# Altium PCB 飞控底板兼容版.PcbDoc
Units mil, origin at the board's own origin, x right, y up, seen from the top; angles counter-clockwise.
Board outline 1946.25 x 1781.68 mil, 4 copper layers (Top Layer, GND, VCC, Bottom Layer), stack 30.634 mil thick; 58 components, 74 nets, 313 pads, 169 vias.
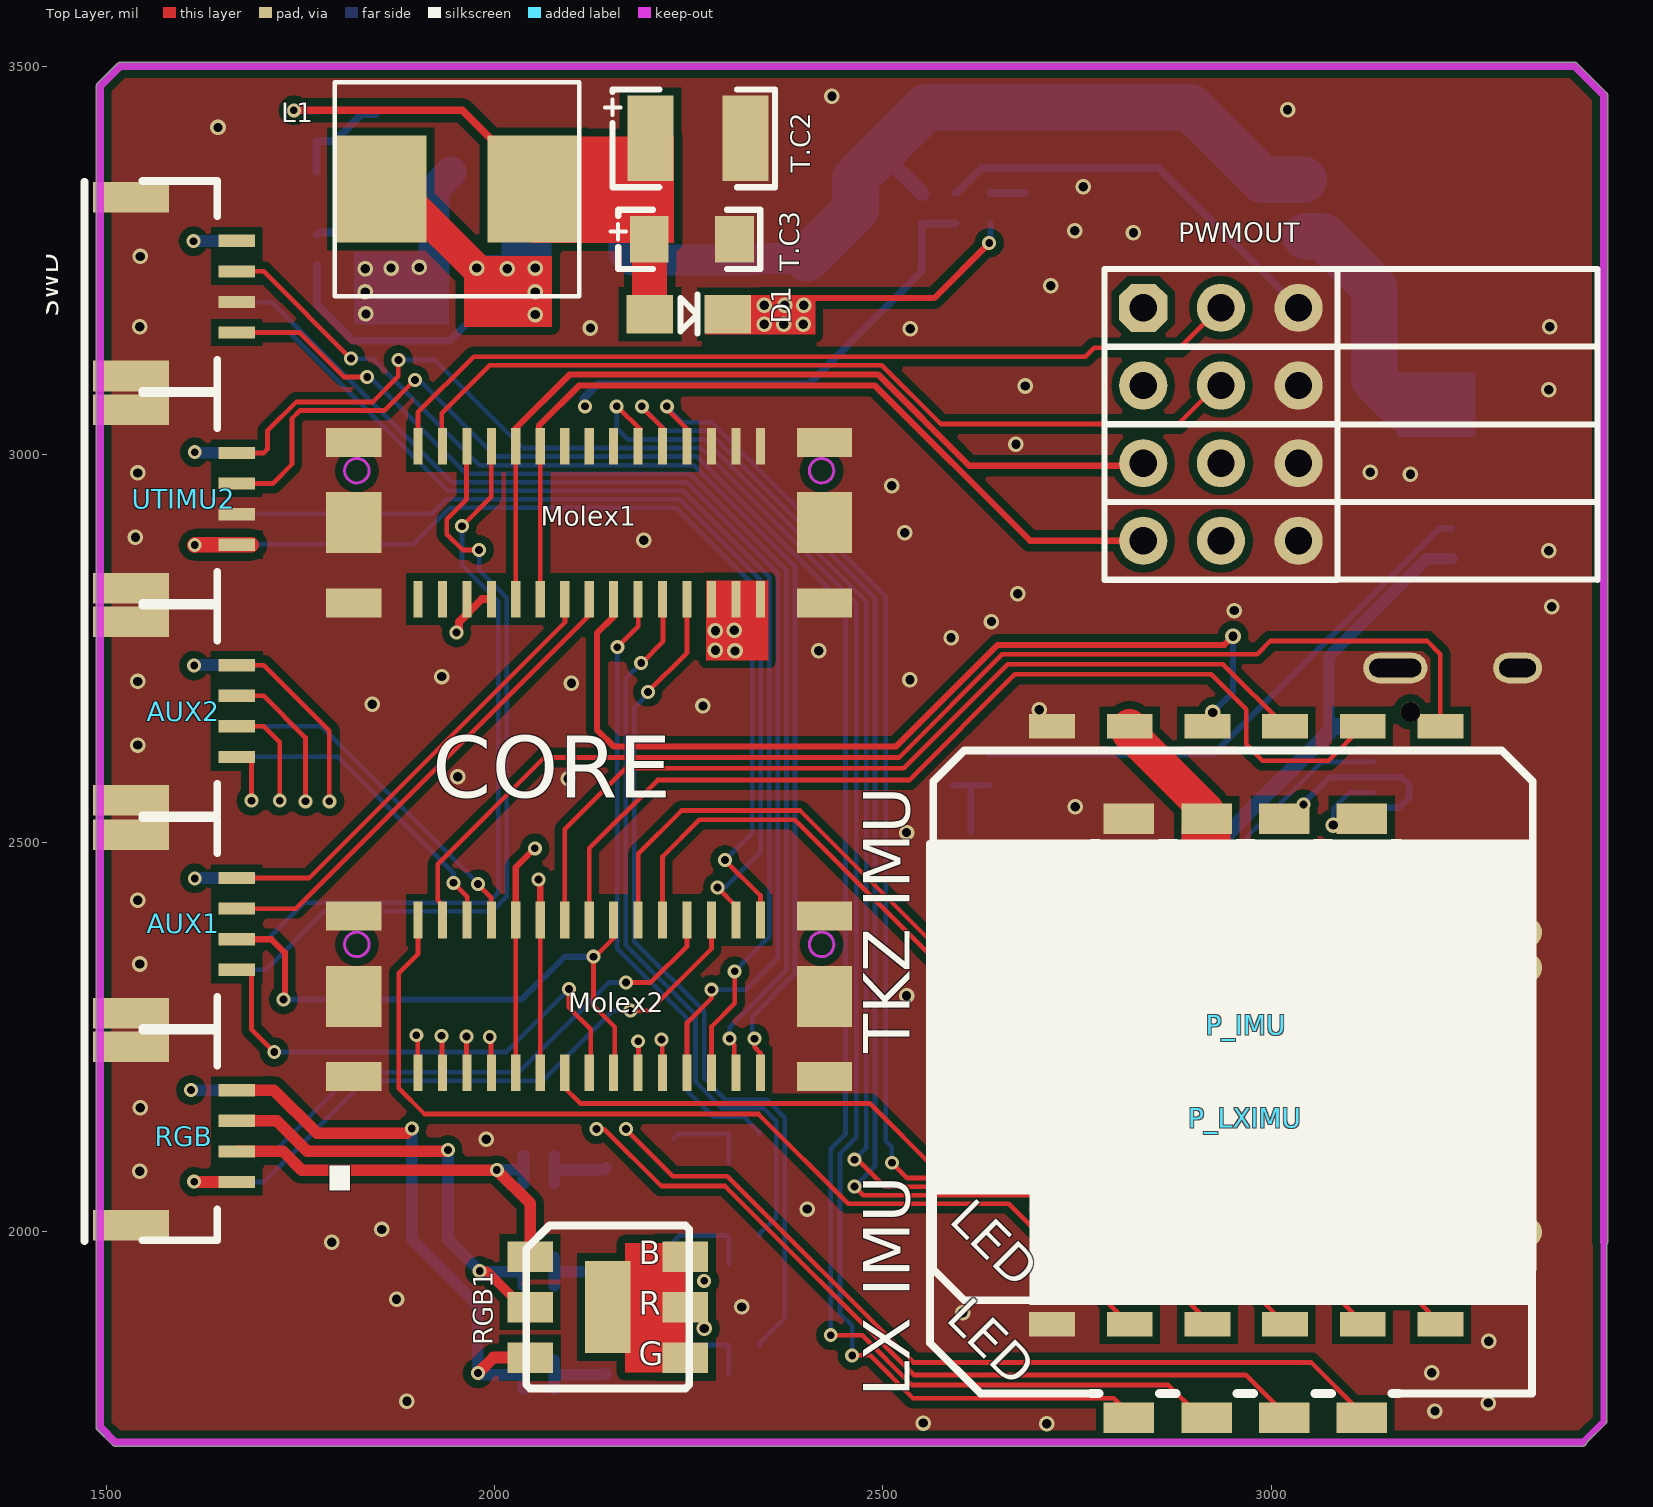
[diagram p0: Top Layer view]
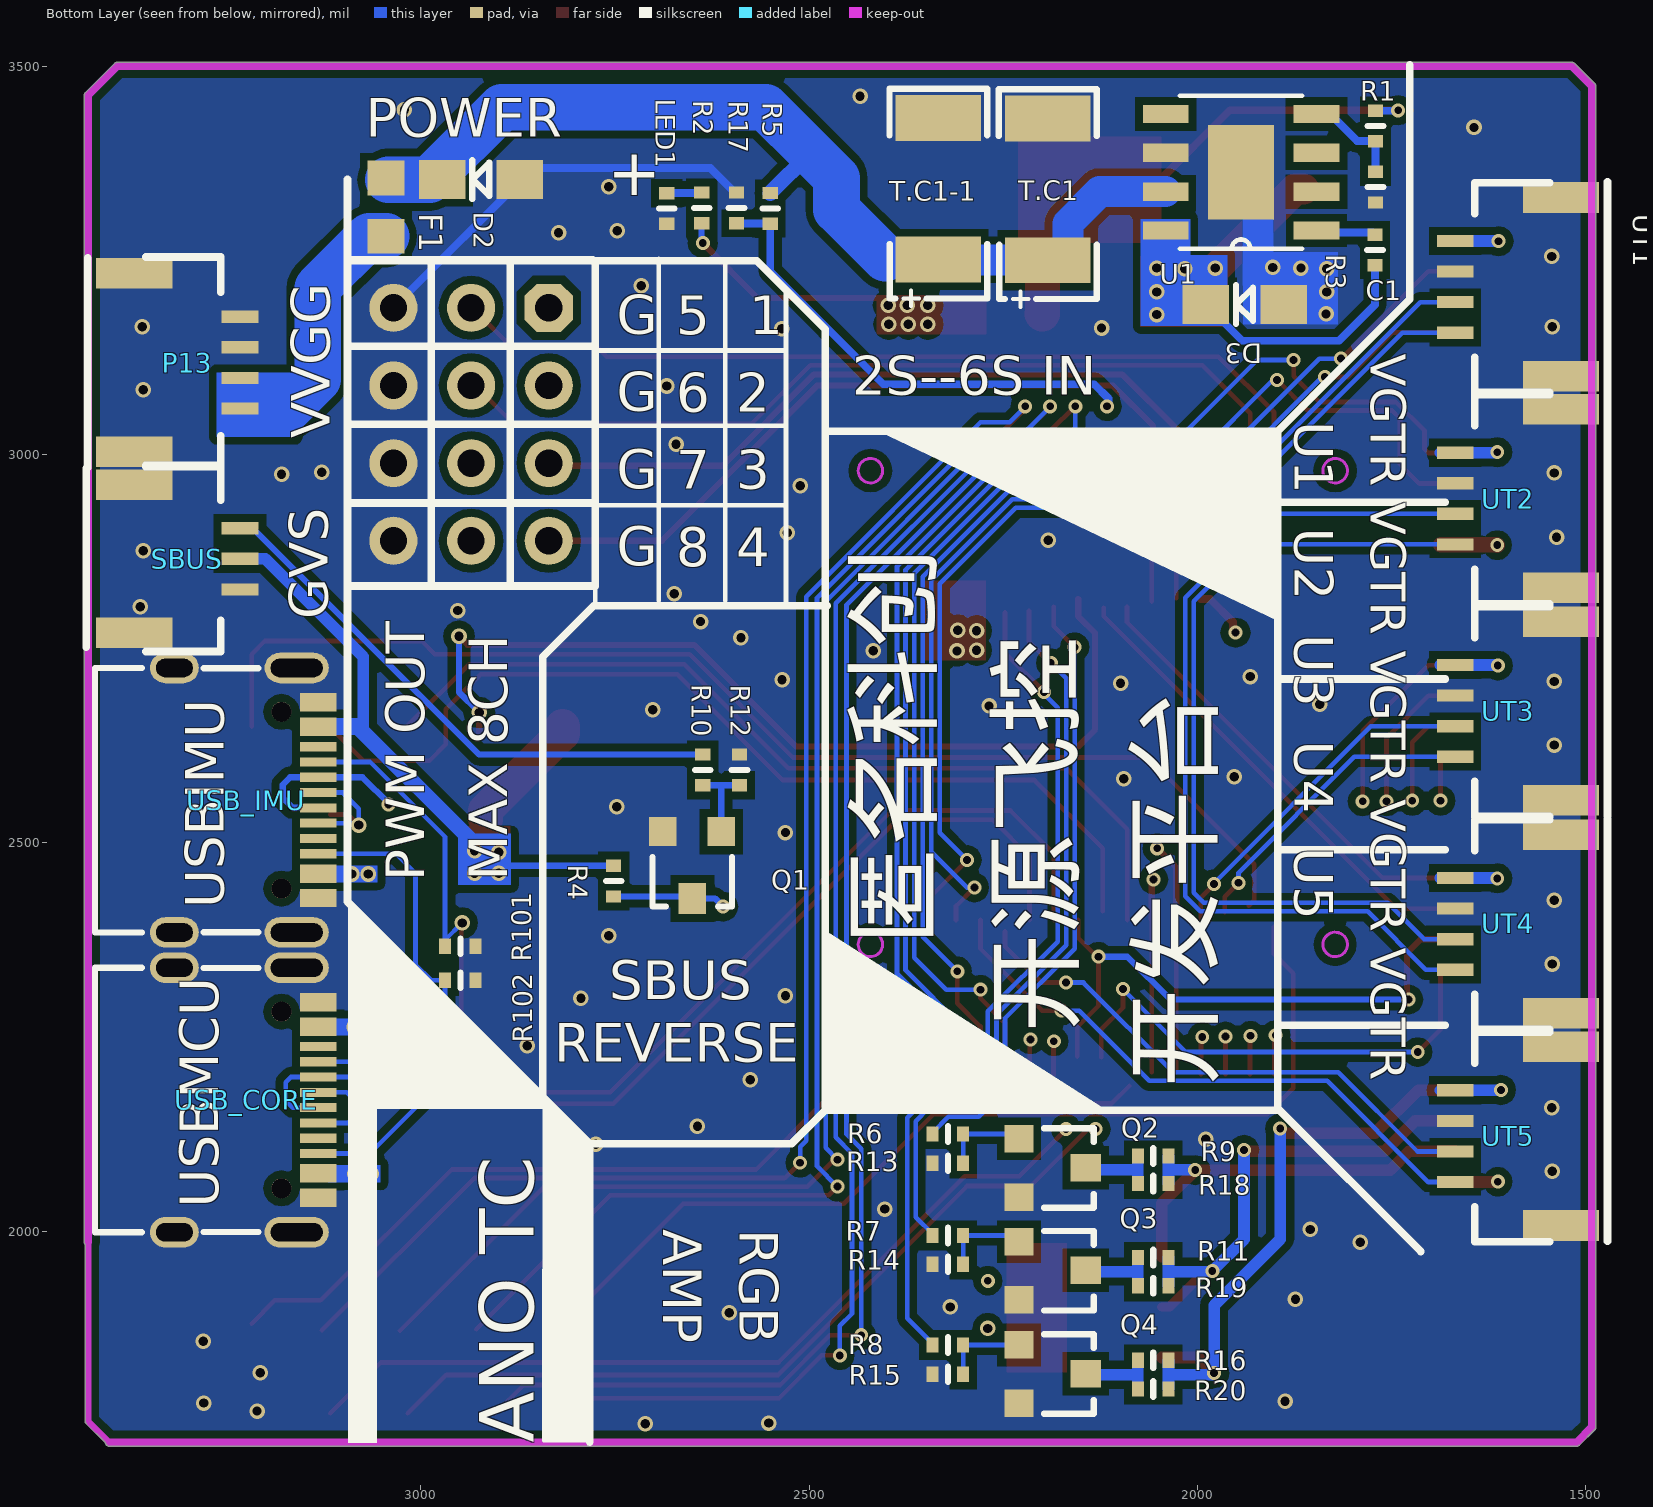
[diagram p1: Bottom Layer view, seen from below]
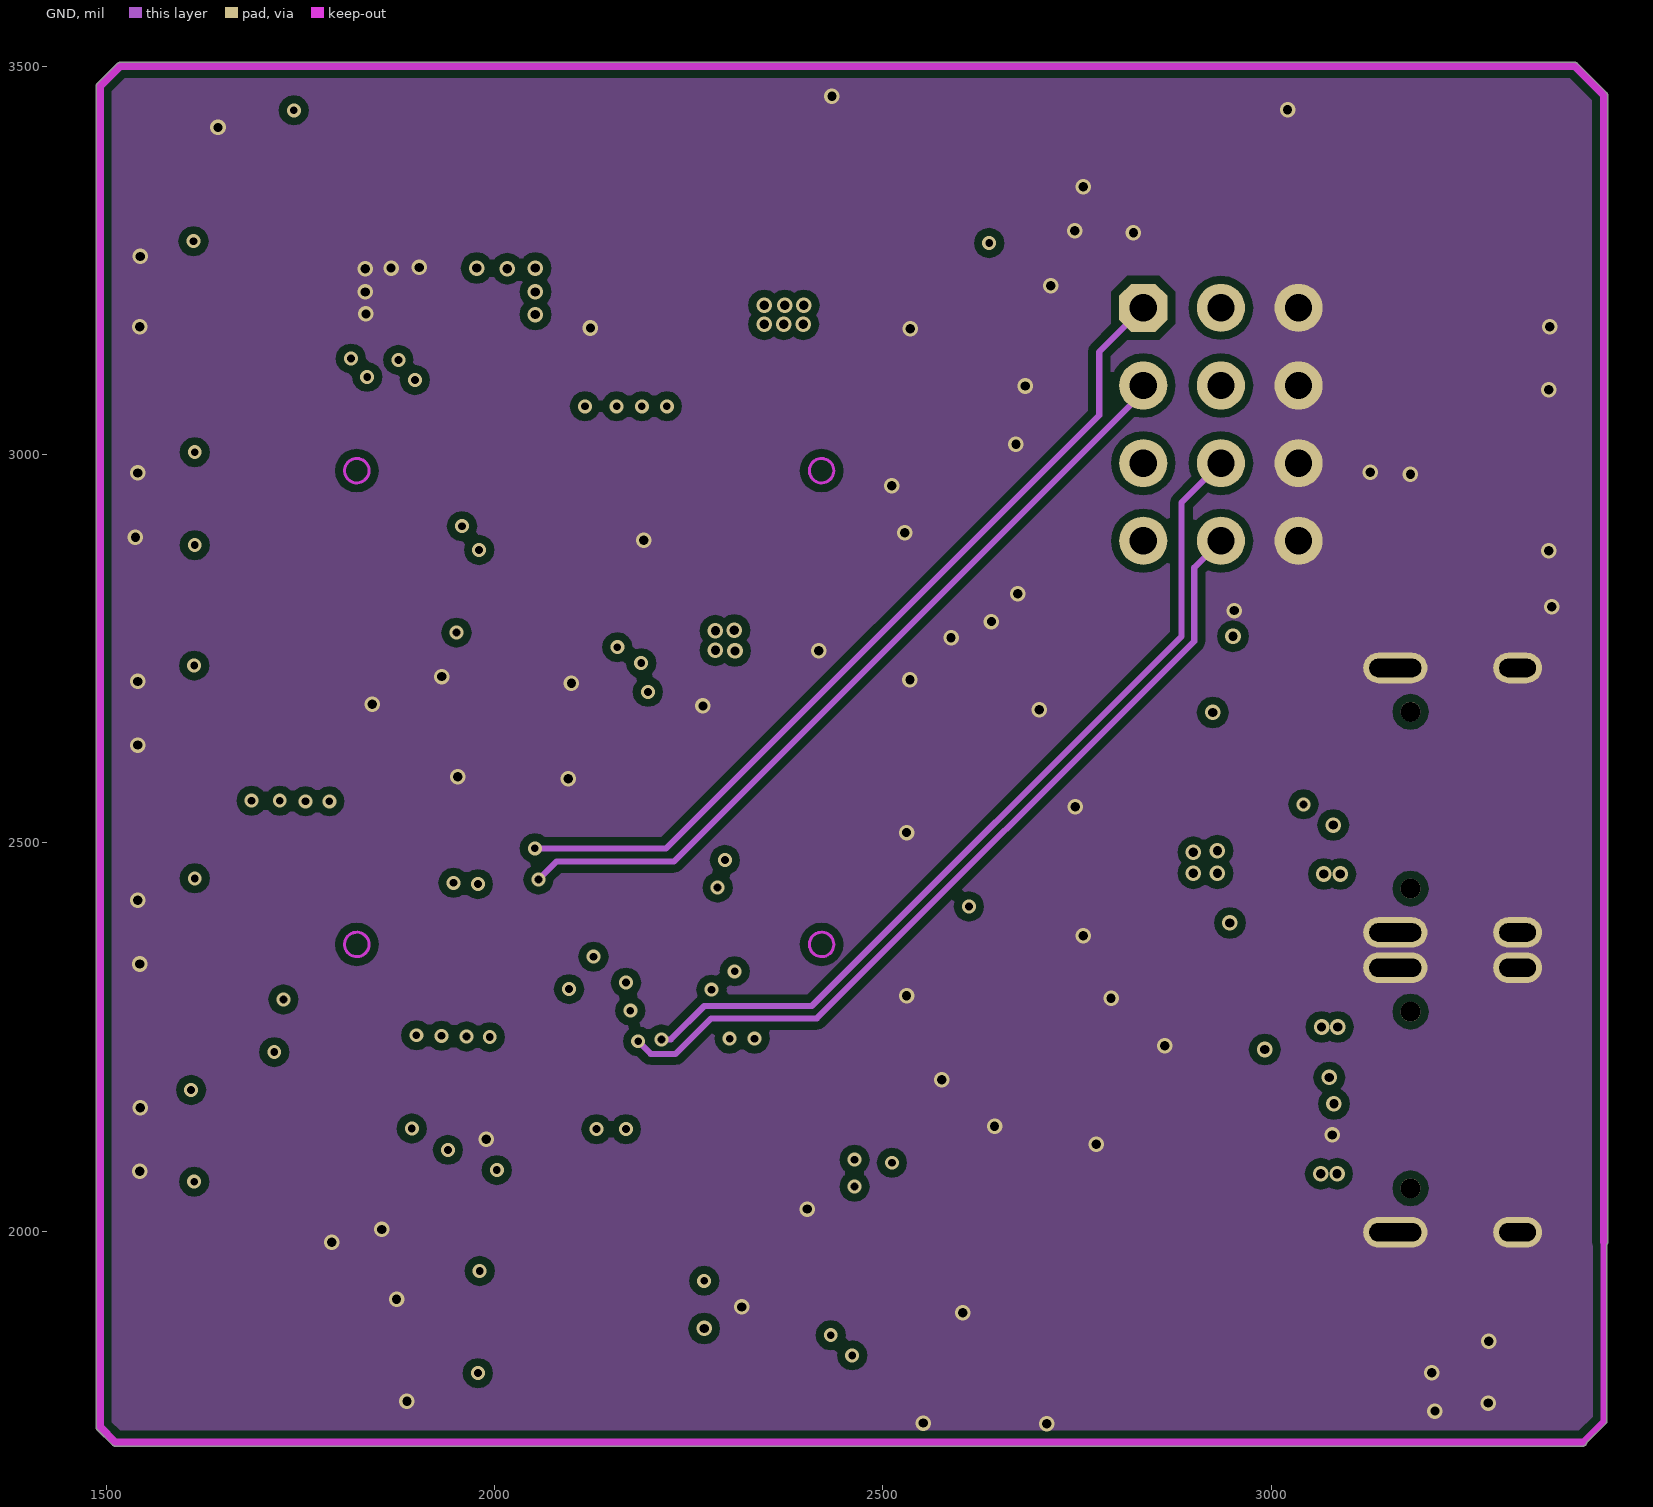
[diagram p2: GND]
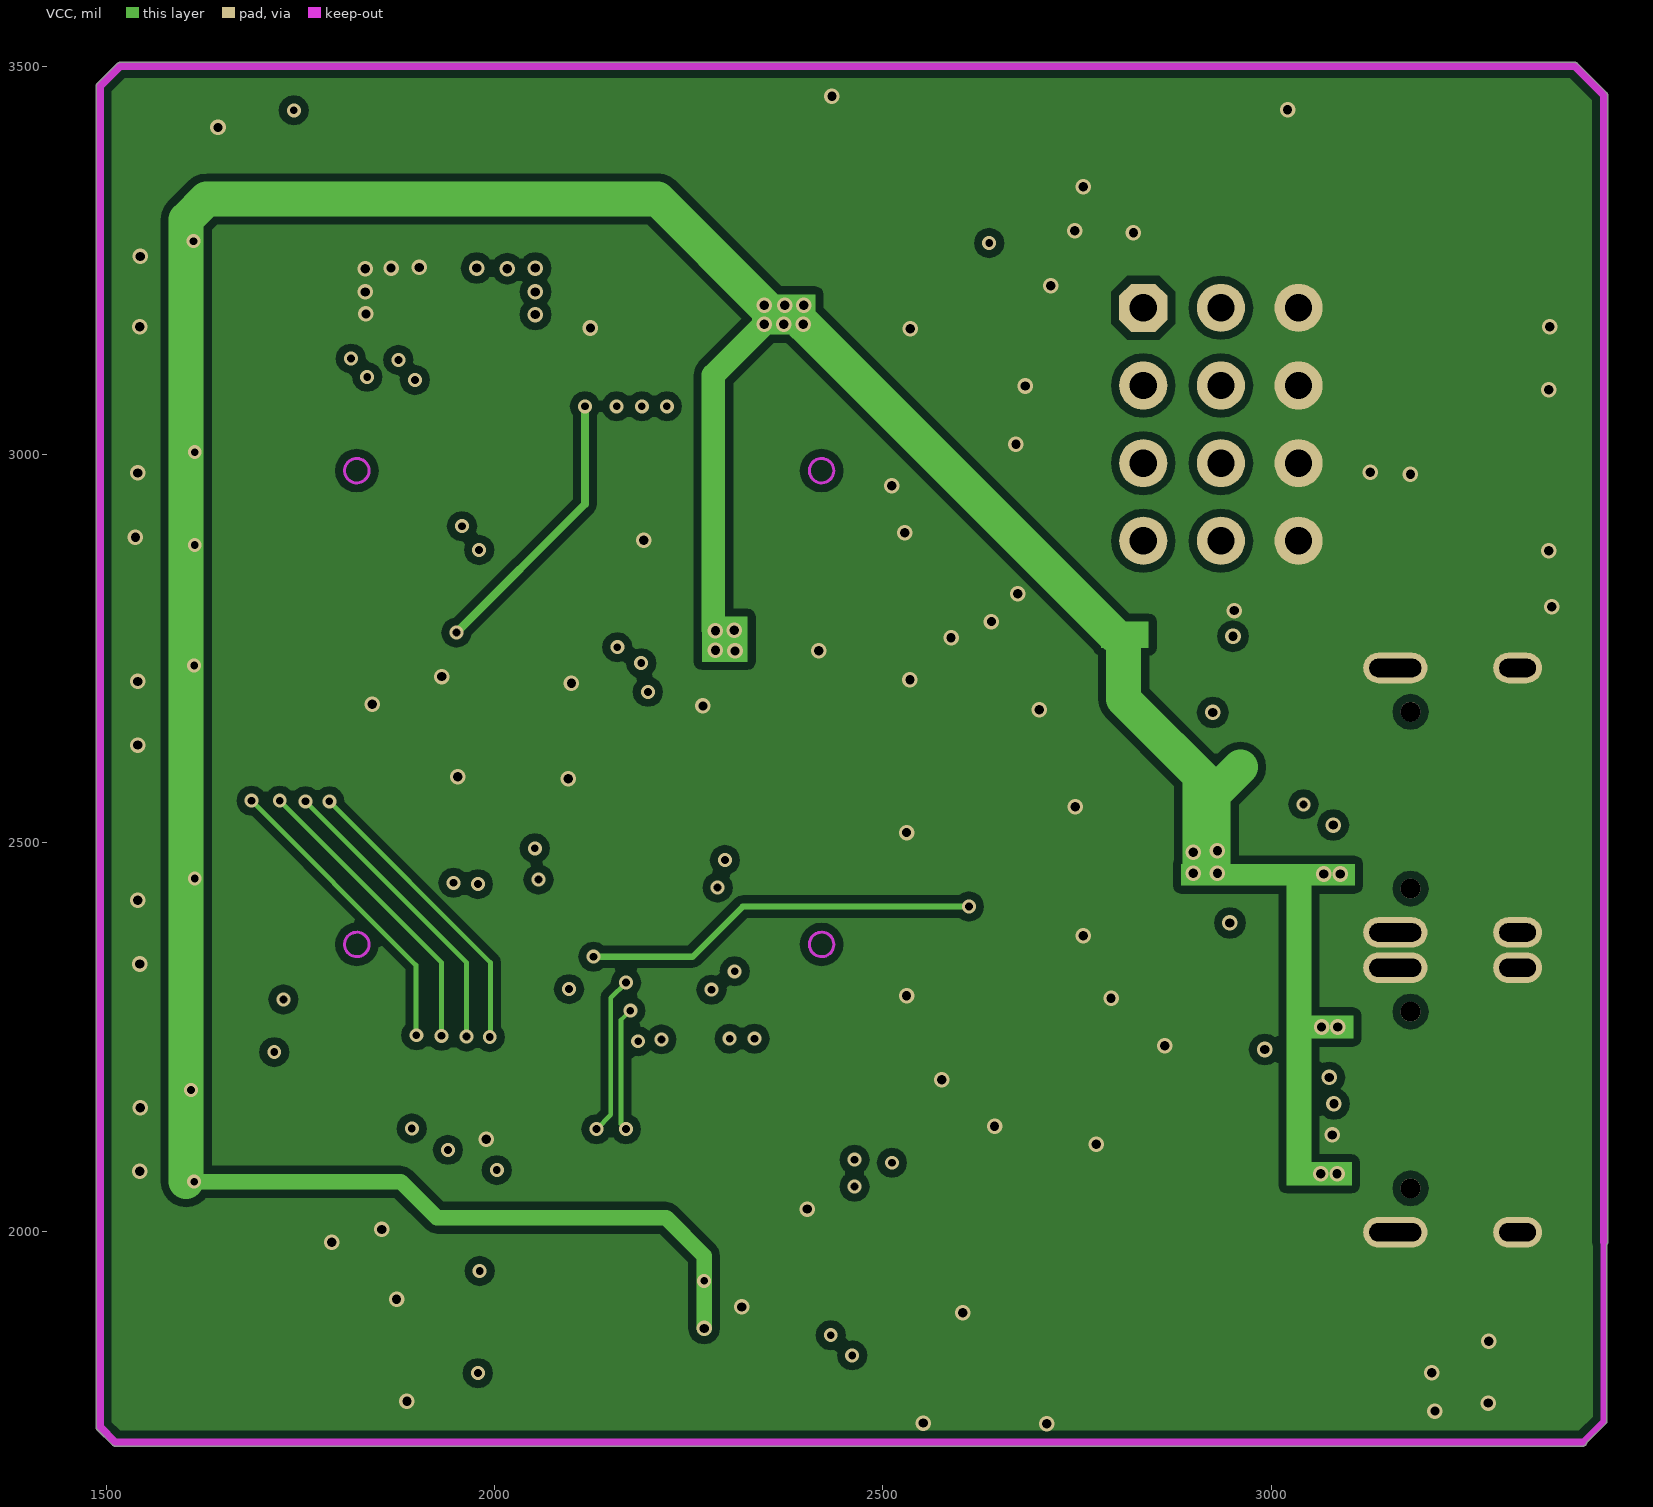
[diagram p3: VCC]

## Layer stack, top to bottom
Top Solder: solder mask 0.4, Solder Resist, Dk 3.5
Top Layer: signal copper 1.4
Dielectric1: core 10, FR-4, Dk 4.2
GND: signal copper 1.417
Dielectric2: prepreg 5, Dk 4.2
VCC: signal copper 1.417
Dielectric3: core 10, Dk 4.2
Bottom Layer: signal copper 1.4
Bottom Solder: solder mask 0.4, Solder Resist, Dk 3.5

## Board outline
1508.11,1724.8 1488.58,1744.33 1488.6,1744.31 cw(c1492.13,1747.87) 1487.11,1747.87 1487.11,3474.13 cw(c1492.13,3474.13) 1488.6,3477.69 1488.58,3477.67 1514.45,3503.55 1514.44,3503.53 cw(c1518,3500) 1518,3505.01 3391,3505.01 cw(c3391,3500) 3394.56,3503.53 3394.55,3503.55 3431.89,3466.2 3431.88,3466.22 cw(c3428.35,3462.65) 3433.36,3462.65 3433.36,1986 cw(c3428.35,1986) 3432.36,1982.99 3432.36,1755.35 cw(c3428.35,1755.35) 3431.17,1752.49 3431.19,1752.51 3406.31,1727.63 cw(c3401.35,1728.35) 3401.35,1723.33 1511.65,1723.33 cw(c1511.65,1728.35)

## Design rules (kind name [scope] priority, off if disabled: settings)
Clearance Clearance_1 [InPolygon] p1: gap=10
Clearance [All] p2: gap=5
ComponentClearance [All] p1: gap=0 collisioncheckmode=3 verticalgap=0 showdistances=FALSE
FabricationTestpoint [(IsPad And (OnTopLayer Or OnBottomLayer))] p1: side=3 testpointundercomponent=TRUE minsize=40 maxsize=100 preferedsize=60 minholesize=0 maxholesize=40 preferedholesize=32 testpointgrid=1 allowsidetop=TRUE allowsidebottom=TRUE usegrid=TRUE gridtolerance=0.01
HoleSize [All] p1: absolutevalues=TRUE maxlimit=196.85 minlimit=1 maxpercent=80.000 minpercent=20.000
HoleToHoleClearance [All] p1: gap=5 allowstackedmicrovias=TRUE
MinimumSolderMaskSliver [All] p1: minsoldermaskwidth=1
PlaneClearance [All] p1: clearance=10
PlaneConnect [All] p1: planeconnectstyle=Direct reliefexpansion=20 reliefentries=4 reliefconductorwidth=10 reliefairgap=10
PolygonConnect [All] p1: connectstyle=Direct reliefconductorwidth=10 reliefentries=4 polygonreliefangle="90 Angle" airgapwidth=10
RoutingVias [All] p1: holewidth=10 width=18 viastyle="Through Hole" minholewidth=10 minwidth=18 maxholewidth=28 maxwidth=50
SilkToSilkClearance [All] p1: silktosilkclearance=0
SilkToSolderMaskClearance [IsPad] p1: minsilkscreentomaskgap=0 clearancetoexposedcopper=TRUE
SolderMaskExpansion [All] p1: expansion=4
Width [All] p1: maxlimit=100 minlimit=4 preferedwidth=5
21 further rules are at their usual default settings.

## Components (designator, comment, footprint, x,y, rotation, side; value= is the part's Value field where it differs from the comment)
AUX1 "AUX_IO" SH_1.0_卧 1540.06,2280.31 r90 top
AUX2 "AUX_IO" SH_1.0_卧 1540.06,2554.32 r90 top
C1 "10nf50v" 0402_small 1771.65,3263.75 r90 bottom
D1 "IN5822" SOD123 2249.61,3181.86 r90 top
D2 "IN5822" SOD123 2922,3353 r270 bottom
D3 "IN5822" SOD123 1938.59,3192.15 r270 bottom
F1 "Comment" 0805_small 3045,3356 r270 bottom
L1 "CD54‐22uH  2A" L-8X7mm-S 1951.97,3341.73 r180 top
LED1 "red" 0402_small 2683.44,3316.54 r270 bottom
Molex1 "MOLEX_30p_母" MOLEX_30p_ĸ 1901.57,3010.79 r0 top
Molex2 "MOLEX_30p_母" MOLEX_30p_ĸ 1901.57,2400.79 r0 top
P13 "power" SH_1.0_卧 3361,3003 r90 bottom
P_IMU "IMU_TKZ" IMU_TKZ_SM2 2603,1911 r0 top
P_LXIMU "IMU_LX" IMU-LX-SM2 2963,2144 r0 top
PWMOUT "HEAD2.54" HEAD1*3*4W 2835.43,3188.98 r270 top
Q1 "si2310" SOT-23 2650.38,2461.42 r0 bottom
Q2 "si2310" SOT-23 2177.17,2081.9 r270 bottom
Q3 "si2310" SOT-23 2177.17,1949.62 r270 bottom
Q4 "si2310" SOT-23 2177.17,1816.55 r270 bottom
R1 "50k" 0402_small 1770.87,3422.86 r270 bottom
R2 "1k" 0402_small 2638.59,3317.35 r270 bottom
R3 "15k" 0402_small 1770.87,3344.12 r270 bottom
R4 "10K" 0402_small 2751.96,2451.17 r90 bottom
R5 "10k 1%" 0402_small 2550.39,3317.31 r90 bottom
R6 "1k" 0402_small 2321.9,2125.2 r0 bottom
R7 "1k" 0402_small 2321.26,1994.48 r180 bottom
R8 "1k" 0402_small 2321.26,1853.54 r180 bottom
R9 "50" 0402_small 2057.47,2096.86 r0 bottom
R10 "1K" 0402_small 2637,2593.71 r270 bottom
R11 "50" 0402_small 2057.47,1966.13 r0 bottom
R12 "10K" 0402_small 2589.75,2593.71 r270 bottom
R13 "10K" 0402_small 2321.26,2087.41 r180 bottom
R14 "10K" 0402_small 2321.26,1957.49 r180 bottom
R15 "10K" 0402_small 2321.26,1815.76 r180 bottom
R16 "50" 0402_small 2057.47,1833.85 r0 bottom
R17 "1k 1%" 0402_small 2593.69,3317.33 r270 bottom
R18 "50" 0402_small 2057.47,2061.41 r0 bottom
R19 "50" 0402_small 2057.47,1929.91 r0 bottom
R20 "50" 0402_small 2057.47,1796.84 r0 bottom
R101 "5.1K" 0402_small 2949,2367 r180 bottom
R102 "5.1K" 0402_small 2949,2323 r180 bottom
RGB "RGB-VBRG" SH_1.0_卧 1540.06,2007.08 r90 top
RGB1 "RGB-LED" zhuixin_5050RGB 2040.93,2002.36 r0 top
SBUS "SBUS" SH_1.0_3P卧 3362,2772 r90 bottom
SWD "swd" SH_1.0_卧 1540.06,3100.78 r90 top
T.C1 "100uf35V" TAN-C(6032-28) 2192.94,3337.79 r180 bottom
T.C1-1 "100uf35V" TAN-C(6032-28) 2333.87,3338.58 r180 bottom
T.C2 "47uf16V" TAN-B(3528-21) 2262.2,3407.11 r270 top
T.C3 "10uf16V" TAN-A(3216-18) 2254.34,3277.14 r180 top
U1 "TPS5430" R-PDSO-G8 1944.06,3268.51 r0 bottom
USB_CORE "Type-C" Type-C 3282,2169 r270 bottom
USB_IMU "Type-C" Type-C 3282,2555 r270 bottom
UT1 "usart1" SH_1.0_卧 1540.06,3331.5 r270 bottom
UT2 "usart2" SH_1.0_卧 1540.06,3058.87 r270 bottom
UT3 "usart3" SH_1.0_卧 1540.06,2785.44 r270 bottom
UT4 "usart4" SH_1.0_卧 1540.06,2511.23 r270 bottom
UT5 "usart5" SH_1.0_卧 1540.06,2237.81 r270 bottom
UTIMU2 "usart_imu" SH_1.0_卧 1540.06,2827.56 r90 top

## Footprints (in the part's own frame and the unit in brackets; to place one, negate y for a bottom-side part, rotate by r counter-clockwise, add the part's x,y. Pads: shape width x height; smd on the part's side, far side on the other; paste and mask are expansions set on the pad)
0402_small [mm]
  rect 0.4x0.5 smd: 1(-0.508,0) 2(0.492,0)
  silkscreen extent -0.01,-0.25 -0.01,0.25, body extent -0.51,-0.25 0.51,0.25, height 0.51
0805_small [mm]
  rect 1.14x1.2 smd: 1(0,0) 2(1.9,0)
HEAD1*3*4W [mil]
  oct 62x62 hole 35: 1(0,0)
  round 62 hole 35: 2(0,100) 3(0,200) 4(100,0) 5(100,100) 6(100,200) 7(200,0) 8(200,100) 9(200,200) 10(300,0) 11(300,100) 12(300,200)
  silkscreen extent -50,-50 350,585, body extent -43,-51 351,249, height 336
IMU-LX-SM2 [mil]
  rect 65x39.37 smd: 1(-146,387) 2(-46,387) 3(54,387) 4(154,387) 5(154,-384) 6(54,-384) 7(-46,-384) 8(-146,-384)
  silkscreen extent -402,-353 373,355
IMU_TKZ_SM2 [mil]
  rect 59.06x31.5 smd: 1(115,739) 2(215,739) 3(315,739) 4(415,739) 5(515,739) 6(615,739) 7(615,-31) 8(515,-31) 9(415,-31) 10(315,-31) 11(215,-31) 12(115,-31)
  silkscreen extent -38,0 734,708
L-8X7mm-S [mm]
  rect 3x3.5 smd: 1(-2.5,0) 2(2.5,0)
  silkscreen extent -4,-3.5 4,3.5, body extent -2.79,-2.67 2.92,2.53, height 4.5
MOLEX_30p_ĸ [mm]
  rect 1.8x0.95 smd: 0(-2.1,-5.125) 0(-2.1,0.125) 0(13.3,-5.125) 0(13.3,0.125)
  rect 1.8x2 smd: 0(-2.1,-2.5) 0(13.3,-2.5)
  rect 0.3x1.2 smd: 1(11.2,0) 2(10.4,0) 3(9.6,0) 4(8.8,0) 5(8,0) 6(7.2,0) 7(6.4,0) 8(5.6,0) 9(4.8,0) 10(4,0) 11(3.2,0) 12(2.4,0) 13(1.6,0) 14(0.8,0) 15(0,0) 16(0,-5) 17(0.8,-5) 18(1.6,-5) 19(2.4,-5) 20(3.2,-5) 21(4,-5) 22(4.8,-5) 23(5.6,-5) 24(6.4,-5) 25(7.2,-5) 26(8,-5) 27(8.8,-5) 28(9.6,-5) 29(10.4,-5) 30(11.2,-5)
  Keep-Out Layer circle w0.1: c-2,-0.8 r0.4
  Keep-Out Layer circle w0.1: c13.2,-0.8 r0.4
R-PDSO-G8 [mil]
  rect 59.06x23.62 smd: 1(-97,-20) 2(-97,-70) 3(-97,-120) 4(-97,-170) 5(97,-170) 6(97,-120) 7(97,-70) 8(97,-20)
  rect 85x122 smd paste-60.5: 9(0,-95)
  silkscreen extent -78,-194 78,4, body extent -122,-194 122,4, height 67
SH_1.0_3P卧 [mm]
  rect 1x2.5 smd: 0(-0.039,0.178) 0(4.803,0.178)
  rect 0.4x1.2 smd: 1(1.381,-3.279) 2(2.381,-3.279) 3(3.381,-3.279)
  silkscreen extent -0.65,-2.64 5.45,1.75
SH_1.0_卧 [mm]
  rect 0.4x1.2 smd: 1(1.432,-3.254) 2(2.432,-3.254) 3(3.432,-3.254) 4(4.432,-3.254)
  rect 1x2.5 smd: 5(0.011,0.203) 5(5.853,0.203)
  silkscreen extent -0.5,-2.62 6.39,1.73, body extent -0.05,-3.43 5.95,1.53, height 3.14
SOD123 [mil]
  rect 50x60 smd: 1(-1.06,49.34) 2(-1.06,-50.66)
  silkscreen extent -26,-12 24,10
SOT-23 [mm]
  rect 0.9x0.95 smd: 1(-0.94,-1.346) 2(0.965,-1.346)
  rect 0.9x1 smd: 3(0,0.838)
  silkscreen extent -1.29,-0.52 1.31,1.1, body extent -1.42,-1.63 1.48,1.17, height 1.3
TAN-A(3216-18) [mil]
  rect 50x60 smd: 1(55,0) 2(-55,0)
  silkscreen extent -88,-38 105,38, body extent -75,-30 75,30, height 39
TAN-B(3528-21) [mm]
  rect 2.8x1.5 smd: 1(0,-1.55) 2(0,1.55)
  silkscreen extent -1.6,-3.05 1.6,2.51
TAN-C(6032-28) [mm]
  rect 2.8x1.5 smd: 1(0,-2.222) 2(0,2.413)
  silkscreen extent -1.6,-3.75 1.6,3.37
Type-C [mm]
  round 0.65 hole 0.65: 0(-2.89,2.6) 0(2.89,2.6)
  oval 1x1.6 hole 0.6 slot 1.2 at 90 deg: 1(4.325,-0.9) 2(-4.325,-0.9)
  oval 1x2.1 hole 0.6 slot 1.7 at 90 deg: 3(-4.325,3.1) 4(4.325,3.1)
  rect 0.3x1.2 smd: A1(-3.35,3.8) A4(-2.55,3.8) A5(-1.25,3.8) A6(-0.25,3.8) A7(0.25,3.8) A8(1.25,3.8) A9(2.55,3.8) A12(3.35,3.8) B1(3.05,3.8) B4(2.25,3.8) B5(1.75,3.8) B6(0.75,3.8) B7(-0.75,3.8) B8(-1.75,3.8) B9(-2.25,3.8) B12(-3.05,3.8)
  silkscreen extent -4.33,-3.5 4.32,1.84, body extent -4.48,-3.5 4.47,4.25, height 3.26
zhuixin_5050RGB [mm]
  rect 1.5x3 smd: 0(2.667,-2.54)
  rect 1.5x1 smd: 1(5.203,-4.191) 2(0.131,-4.191) 3(5.203,-2.54) 4(0.131,-2.54) 5(5.203,-0.889) 6(0.131,-0.889)
  silkscreen extent 0,-5.21 5.33,0.13

## Part data
AUX1 AUX2 P13 RGB SWD UT1 UT2 UT3 UT4 UT5 UTIMU2: library part "Header 4", "Header, 4-Pin"
C1: library part CAP_0402
D1 D2 D3: library part IN5822-SS34, "肖特基二极管"
L1: library part L
LED1: library part D-LED, "LED"
Molex1 Molex2: library part MOLEX_30p_ĸ
PWMOUT: library part HEAD1*3*4
Q1 Q2 Q3 Q4: library part "MOSFET N"
R1 R2 R3 R4 R5 R6 R7 R8 R9 R10 R11 R12 R13 R14 R15 R16 R17 R18 R19 R20: library part Res, "Resistor"
R101 R102: library part R, "贴片电阻"
SBUS: library part HEADER_3P
T.C1 T.C1-1 T.C2 T.C3: library part "Cap TAN", "TAN Capacitor (Radial)"
U1: "9脚与地连接"
USB_CORE USB_IMU: "typeC"

## Via types
v1: diameter 20, hole 12, Top Layer to Bottom Layer, tented both sides, 105 vias
v2: diameter 18, hole 10, Top Layer to Bottom Layer, tented both sides, 64 vias

## Nets (pads, with @x,y where several pads share a name; then routed paths per layer and width w, separated by ;. In a path a pad name is that pad's centre, name@x,y a point inside that pad or via, vN(x,y) a via of type N, cw(c..) or ccw(c..) an arc to the next point about the centre after c; other vN are vias at no path point)
CC1: R101.1 USB_CORE.A5 USB_IMU.A5 | length 703.9
  Top Layer w6: v1(2947,2397) 2948,2396 2948,2278 v1(2992,2234)
  Bottom Layer w6: v1(2947,2397) R101.1@2969,2375 ; R101.1 R101.1@2969,2375 ; v1(2992,2234) 2996,2230 3078,2230 3089.79,2218.21 USB_CORE.A5 ; USB_IMU.A5 3065.21,2604.21 2969,2508 R101.1@2969,2375
CC2: R102.1 USB_CORE.B5 USB_IMU.B5 | length 629.7
  Bottom Layer w6: USB_CORE.B5 3065.9,2100.1 2969,2197 R102.1 2986.99,2322.99 3007,2343 3007,2461.1 3032,2486.1 USB_IMU.B5
DM: Molex2.6 USB_CORE.A7 USB_CORE.B7 | length 1327.5
  Top Layer w6: Molex2.6 2185.04,2485.83 2240.94,2541.73 2393.51,2541.73 2756.24,2179 3056,2179 v1(3075,2198)
  Bottom Layer w6: v1(3075,2198) 3075.53,2198.53 USB_CORE.B7 3167.47,2198.53 3174,2192 3174,2168 3165.16,2159.16 USB_CORE.A7
DP: Molex2.5 USB_CORE.A6 USB_CORE.B6 | length 1243.5
  Top Layer w6: Molex2.5 2216.54,2482.54 2263.92,2529.92 2386.61,2529.92 2704.72,2211.81 2752.54,2164 v1(3081,2164)
  Bottom Layer w6: USB_CORE.B6 3093.53,2139.47 3081,2152 v1(3081,2164) 3095.84,2178.84 USB_CORE.A6
GND: AUX1.5 AUX2.5 D2.1 D3.1 LED1.2 Molex1.0 Molex1.1 Molex1.2 Molex1.3 Molex2.0 P13.3 P13.4 P13.5 P_IMU.1 P_IMU.12 P_LXIMU.1 PWMOUT.3 PWMOUT.6 PWMOUT.9 PWMOUT.12 Q1.2 Q2.2 Q3.2 Q4.2 R3.2 R12.1 R13.1 R14.1 R15.1 R17.1 R101.2 R102.2 RGB.5 SBUS.0 SBUS.1 SWD.2 SWD.5 T.C1-1.2 T.C1.2 T.C2.2 T.C3.2 U1.6 U1.9 USB_CORE.1 USB_CORE.2 USB_CORE.3 USB_CORE.4 USB_CORE.A1 USB_CORE.A12 USB_CORE.B1 USB_CORE.B12 USB_IMU.1 USB_IMU.2 USB_IMU.3 USB_IMU.4 USB_IMU.A1 USB_IMU.A12 USB_IMU.B1 USB_IMU.B12 UT1.2 UT1.5 UT2.2 UT2.5 UT3.2 UT3.5 UT4.2 UT4.5 UT5.2 UT5.5 UTIMU2.2 UTIMU2.5 | length 725.3
  Bottom Layer w10: R17.1 2595.67,3337.33 2627.34,3369 2855.41,3369 PWMOUT.3
  Bottom Layer w40: D3.1 1894.25,3193.22 1922.05,3221.02 1922.05,3341.49 U1.9
  other v1: 2711,1752 2552,1753 3211.02,1768.5 3279.53,1778.74 1887.4,1781.1 3207,1818 3280.32,1858.27 2603,1895 2318.67,1902.57 1874.02,1912.6 1790.55,1985.83 1855.12,2002.36 2402.67,2028.57 1543.31,2077.17 2775,2112 1989.67,2118.57 3079,2124 2644,2135 1544.09,2159.06 2576,2195 2863,2239 2794,2300 2530.71,2303.15 1543.31,2344.09 2758.27,2380.32 1540.94,2425.98 2530.71,2513.39 2748.03,2546.46 2094.97,2582.66 1953,2585 1540.94,2625.98 2701.57,2671.65 2268.5,2676.38 1842.52,2678.74 2099.21,2705.51 1540.94,2707.87 2535,2710 1932.28,2714.17 2417.5,2747.38 2588,2764 2640,2785 2952.76,2799.21 3361.42,2803.94 2674,2821 3357.48,2876.38 2192.13,2889.76 1537.8,2893.7 2528.35,2899.21 2511.81,2959.84 3179.53,2974.8 1540.94,2976.38 3127.56,2977.17 2671.54,3013.32 3357.48,3083.46 2683.54,3088.32 2535.43,3162.2 2123.62,3162.99 1543.31,3164.57 3359.06,3164.57 1834.65,3181.1 1833.86,3209.45 2716.54,3217.32 1833.86,3239.37 1866.93,3240.16 1903.15,3240.94 1544.09,3255.12 2822.83,3285.83 2747.24,3288.19 2758.27,3344.88 1644.09,3421.26 3021.26,3444.09 2434.65,3461.42
GYR_INT: Molex2.22 P_IMU.7 | length 1256.7
  Top Layer w6: Molex2.22@2088,2187 2110.43,2164.57 2483.46,2164.57 2568.55,2079.48 2960.52,2079.48 3129,1911 3188,1911 P_IMU.7@3218,1881
IO_1: AUX1.1 Molex2.23 | length 630.7
  Top Layer w6: AUX1.1@1687.16,2336.7 1687.16,2260.08 v2(1716.54,2230.71) ; v2(2096.06,2311.81) 2096.06,2287.94 2124,2260 Molex2.23@2124,2224
  Bottom Layer w6: v2(1716.54,2230.71) 2014.96,2230.71 v2(2096.06,2311.81)
IO_2: AUX1.2 Molex2.7 Molex2.24 Q1.3 R4.1 | length 1408.9
  Top Layer w6: v2(2127.56,2353.54) v2@2127.56,2351.56 ; Molex2.7 2153.54,2377.54 v2@2127.56,2351.56 ; Molex2.24@2155,2225 2155,2263 2127.56,2290.44 v2@2127.56,2351.56
  Top Layer w8: AUX1.2 1712.91,2376.07 1730.26,2358.72 1730.26,2300.34 v2(1728.35,2298.43)
  VCC w8: v2(2127.56,2353.54) 2255.12,2353.54 2319.68,2418.11 v2(2611.02,2418.11)
  Bottom Layer w8: v2(1728.35,2298.43) 2035.43,2298.43 2090.55,2353.54 v2(2127.56,2353.54) ; v2(2611.02,2418.11) 2621.34,2428.42 Q1.3 2653.12,2431.16 R4.1
IO_3: AUX1.3 Molex1.23 | length 619.8
  Top Layer w6: AUX1.3 1744.44,2415.44 2121,2792 Molex1.23@2121,2803
IO_4: AUX1.4 Molex1.22 | length 578.9
  Top Layer w6: AUX1.4 1761.36,2454.81 2091,2784.45 Molex1.22@2091,2804
IO_5: AUX2.1 Molex2.16 | length 495.2
  Top Layer w6: AUX2.1@1687.16,2610.71 1687.16,2554.57 v2(1687.4,2554.33) ; v2(1899.51,2252.36) 1901.09,2250.79 Molex2.16@1901.09,2201.97
  VCC w6: v2(1687.4,2554.33) 1899,2342.73 v2@1899,2254.33
IO_6: AUX2.2 Molex2.17 | length 576
  Top Layer w6: AUX2.2 1702.91,2650.08 1723.62,2629.37 v2(1723.62,2554.33) ; v2(1931.8,2251.57) 1932.58,2250.79 Molex2.17@1932.58,2201.97
  VCC w6: v2(1723.62,2554.33) 1931.8,2346.16 v2@1931.8,2253.54
IO_7: AUX2.3 Molex2.18 | length 628.4
  Top Layer w6: AUX2.3 1702.91,2689.45 1756.69,2635.67 v2(1756.69,2553.54) ; Molex2.18@1964.08,2201.97 v2(1964.08,2250.79)
  VCC w6: v2(1756.69,2553.54) 1964,2346.24 v2@1964,2252.76
IO_8: AUX2.4 Molex2.19 | length 681.3
  Top Layer w6: AUX2.4 1702.91,2728.82 1787.4,2644.33 v2(1787.4,2553.54) ; v2(1994,2250) 1995.57,2248.43 Molex2.19@1995.57,2201.97
  VCC w6: v2(1787.4,2553.54) 1995,2345.94 v2@1995,2251.97
LED_1: Molex1.27 R8.1 | length 1096.9
  Top Layer w6: v2(2197.64,2694.49) 2248.03,2744.88 Molex1.27@2248.03,2797
  Bottom Layer w6: v2(2197.64,2694.49) 2197.64,2691.39 2180.27,2674.02 2180.27,2372.84 2270,2283.11 2270,2196.69 2297.45,2169.24 2351.04,2169.24 2373.99,2146.29 2373.99,1888.22 2341.15,1855.38 2341.15,1853.53 R8.1
LED_2: Molex1.26 R7.1 | length 946
  Top Layer w6: v2(2188.98,2731.5) 2188.98,2730.98 2217,2759 Molex1.26@2217,2799
  Bottom Layer w6: v2(2188.98,2731.5) 2169.27,2711.79 2169.27,2368.29 2259,2278.56 2259,2192.13 2292.89,2158.24 2346.48,2158.24 2362.99,2141.73 2362.99,2018.17 2341.27,1996.45 R7.1
LED_3: Molex1.25 R6.2 | length 790
  Top Layer w6: v2(2158.27,2751.97) 2159.06,2752.76 2158.66,2753.15 2158.66,2752.66 2185,2779 Molex1.25@2185,2804
  Bottom Layer w6: v2(2158.27,2751.97) 2158.27,2363.73 2248,2274 2248,2181.13 2281.89,2147.24 2321.2,2147.24 2341.27,2127.18 R6.2
NetC1_1: C1.1 D3.2 L1.2 U1.8 | length 611.8
  Top Layer w40: L1.2@1863.78,3341.73 1874.8,3341.73 1996.85,3219.69 2003.15,3213.39 2003.15,3208.66
  Bottom Layer w10: C1.1 1771.64,3192.92 1818.01,3146.56 1942.59,3146.56 D3.2
  Bottom Layer w40: D3.2 1994.25,3193.22 2031.53,3230.5 2031.53,3240.16 U1.8@2031.53,3280.32
  other v1: 2052.76,3180.32 2052.76,3209.45 2016.54,3239.37 1977.17,3240.16 2052.76,3240.16
NetC1_2: C1.2 U1.1 | length 77.7
  Bottom Layer w10: C1.2 1774.34,3285.81 1844.36,3285.81 U1.1
NetD1_1: D1.1 L1.1 R1.1 T.C2.1 T.C3.1 | length 482.6
  Top Layer w10: v2(1741.73,3443.31) 1958.66,3443.31 2050.39,3351.57 L1.1
  Top Layer w45: T.C3.1 2199.8,3276.67 2199.8,3181.26 D1.1
  Bottom Layer w10: v2(1741.73,3443.31) 1742.52,3443.31 1742.96,3442.87 R1.1
NetLED1_1: LED1.1 R2.1 | length 45.2
  Bottom Layer w10: R2.1 2639,3336.95 2683.04,3336.95 LED1.1
NetQ1_1: Q1.1 R10.2 R12.2 | length 107.2
  Bottom Layer w8: R12.2 2613.38,2574.34 ; Q1.1 2613.38,2574.34 ; R10.2 2613.38,2574.34
NetQ2_1: Q2.1 R6.1 R13.2 | length 112.1
  Bottom Layer w6: Q2.1 2236.48,2125.21 R6.1 R13.2
NetQ3_1: Q3.1 R7.2 R14.2 | length 112
  Bottom Layer w6: Q3.1 2238.03,1994.48 R7.2 R14.2
NetQ4_1: Q4.1 R8.2 R15.2 | length 109.5
  Bottom Layer w6: Q4.1 R8.2 R15.2
NetR1_2: R1.2 R3.1 U1.4 | length 130.1
  Bottom Layer w10: R3.1 R1.2 1771.32,3403.94 1794.77,3403.94 1829.35,3438.51 U1.4
OTG_FS_DM: P_LXIMU.3 USB_IMU.A7 USB_IMU.B7 | length 223.9
  Bottom Layer w6: v2@3041.07,2550.27 v2(3041.73,2549.61)
  Bottom Layer w8: v2@3041.07,2550.27 3075.32,2584.53 USB_IMU.B7 3168.47,2584.53 3178,2575 3178,2558 3165.16,2545.16 USB_IMU.A7
OTG_FS_DP: P_LXIMU.4 USB_IMU.A6 USB_IMU.B6 | length 178.1
  Top Layer w6: v1(3080,2523) 3093.61,2536.61 P_LXIMU.4@3116.99,2536.61
  Bottom Layer w6: USB_IMU.B6 3082.47,2525.47 v1(3080,2523) 3080,2544 3100.84,2564.84 USB_IMU.A6
POWER_INPUT: Molex1.18 Molex1.19 R5.1 R17.2 | length 1047.7
  Top Layer w10: v2(1951.18,2770.87) 1954.33,2774.02 1954.33,2784.54 1983.72,2813.94 Molex1.19
  VCC w10: v2(1951.18,2770.87) 2116.54,2936.22 v2(2116.54,3062.2)
  Bottom Layer w10: v2(2116.54,3062.2) 2114.77,3063.97 2114.77,3072.25 2133.07,3090.55 2404.65,3090.55 2550.38,3236.28 R5.1 2550.71,3297.63 2593.37,3297.63 R17.2
PWMOUT_1: Molex2.11 Molex2.20 PWMOUT.1 | length 1417.8
  Top Layer w6: Molex2.20@2027.57,2204.84 Molex2.11@2027.57,2401.69
  Top Layer w8: Molex2.11@2027.57,2401.69 2027.57,2468.57 v2(2052,2493)
  GND w8: v2@2052,2492.91 2220.99,2492.91 2778.74,3050.67 2778.74,3132.28 PWMOUT.1
PWMOUT_2: Molex2.10 Molex2.21 PWMOUT.4 | length 1304
  Top Layer w6: Molex2.21@2059.07,2204.58 Molex2.10@2059.07,2401.43
  Top Layer w8: v2(2056.72,2452.84) 2055.9,2452.84 2059.07,2456.01 Molex2.10@2059.07,2401.43
  GND w8: v2(2056.72,2452.84) 2079.88,2476 2231,2476 2835.43,3080.43 PWMOUT.4
PWMOUT_3: Molex1.11 Molex1.20 PWMOUT.7 | length 1086.2
  Top Layer w6: Molex1.20@2027.57,2814.94 Molex1.11@2027.57,3011.79
  Top Layer w8: Molex1.11@2025.74,3031.74 2097.15,3103.15 2493.98,3103.15 2611.55,2985.57 2832.03,2985.57 PWMOUT.7
PWMOUT_4: Molex1.10 Molex1.21 PWMOUT.10 | length 1087.9
  Top Layer w6: Molex1.21@2059.07,2810.94 Molex1.10@2059.07,3007.79
  Top Layer w8: Molex1.10@2057.54,3028.54 2057.54,3037.54 2108.98,3088.98 2489.76,3088.98 2689.76,2888.98 PWMOUT.10
PWMOUT_5: Molex1.15 PWMOUT.2 | length 1125.1
  Top Layer w6: Molex1.15@1901.57,3019 1901.57,3054.49 1973.24,3126.15 2760.8,3126.15 2772.44,3137.8 2882.68,3137.8 2933.86,3188.98 PWMOUT.2
PWMOUT_6: Molex1.14 PWMOUT.5 | length 1109.4
  Top Layer w6: Molex1.14@1932,3025 1932,3053.42 1993.73,3115.15 2498.95,3115.15 2574.73,3039.37 2880.32,3039.37 2929.92,3088.98 PWMOUT.5
PWMOUT_7: Molex2.26 PWMOUT.8 | length 1173.9
  Top Layer w6: Molex2.26@2215,2202.91 2216.18,2204.09 2216.18,2245.82 v2(2215,2247)
  GND w8: v2(2215,2247) 2227,2247 2270,2290 2408.9,2290 2884.65,2765.75 2884.65,2938.19 PWMOUT.8
PWMOUT_8: Molex2.25 PWMOUT.11 | length 1133.2
  Top Layer w6: v2(2185.08,2244.64) 2188.23,2241.49 2187.87,2241.49 2185.47,2239.09 2185.47,2200.94 Molex2.25@2185.87,2200.54
  GND w8: v2(2185.08,2244.64) 2201.37,2228.35 2233.35,2228.35 2279,2274 2415.2,2274 2901,2759.8 2901,2854.54 PWMOUT.11
R1: Q2.3 R9.2 R18.2 | length 103.9
  Bottom Layer w15: R18.2 2076.83,2079.14 ; R9.2 2076.83,2079.14 ; Q2.3 2141.41,2079.14 2076.83,2079.14
R2: Q3.3 R11.2 R19.2 | length 104.2
  Bottom Layer w15: R19.2 2076.83,1948.03 ; R11.2 2076.83,1948.03 ; Q3.3 2142.58,1948.03 2076.83,1948.03
R3: Q4.3 R16.2 R20.2 | length 104.8
  Bottom Layer w15: R20.2 2076.83,1815.35 ; R16.2 2076.83,1815.35 ; Q4.3 2142.98,1815.35 2076.83,1815.35
R4: R9.1 R18.1 RGB1.6 RGB.2 | length 544.1
  Top Layer w15: RGB.2 1727.87,2102.84 1751.97,2078.74 v2(2003.15,2078.74) 2046.09,2035.8 RGB1.6
  Bottom Layer w15: v2(2003.15,2078.74) 2003.55,2079.14 2037.46,2079.14 ; R18.1 2037.46,2079.14 ; R9.1 2037.46,2079.14
R5: R11.1 R19.1 RGB1.4 RGB.3 | length 638.8
  Top Layer w12: v2(1981.1,1948.82) 1989.78,1948.82 2036.24,1902.36 RGB1.4
  Top Layer w15: RGB.3 1720,2142.21 1758.98,2103.22 1938.66,2103.22 v2(1940.16,2104.72)
  Bottom Layer w15: v2(1940.16,2104.72) 1940.16,1989.76 v2(1981.1,1948.82) 1981.89,1948.03 2037.46,1948.03 ; R19.1 2037.46,1948.03 ; R11.1 2037.46,1948.03
R6: R16.1 R20.1 RGB1.2 RGB.4 | length 773.6
  Top Layer w15: RGB.4 1716.06,2181.58 1771.65,2125.98 1887.4,2125.98 v2(1893.7,2132.28) ; v2(1978.74,1817.32) 1998.77,1837.36 RGB1.2
  Bottom Layer w15: v2(1893.7,2132.28) 1893.7,1989.76 1978.74,1904.72 v2(1978.74,1817.32) 1980.71,1815.35 2037.46,1815.35 ; R20.1 2037.46,1815.35 ; R16.1 2037.46,1815.35
SBUS_IN: R10.1 SBUS.3 | length 716.6
  Bottom Layer w8: R10.1 2925.02,2613.71 3216.44,2905.13 SBUS.3
SPI2_CS1: Molex1.4 P_IMU.8 | length 1867.6
  Top Layer w6: v2@2222.05,3068.2 v2(2222.05,3062.2) 2222.05,3058.95 Molex1.4@2249,3032 ; v2(2511.81,2088.19) 2531.52,2068.48 2931.52,2068.48 P_IMU.8@3127.5,1872.5
  Bottom Layer w6: v2@2222.05,3061.42 2241.97,3041.5 2279.49,3041.5 2504,2816.99 2504,2116.47 2511.81,2108.66 v2(2511.81,2088.19)
SPI2_CS2: Molex1.6 P_IMU.9 | length 1865.7
  Top Layer w6: v2@2157.48,3061.42 2159.06,3059.84 2159.06,3061.13 Molex1.6@2188.19,3032 ; v2(2463.78,2092.13) 2467.72,2092.13 2502.36,2057.48 2841.52,2057.48 P_IMU.9@3027,1872
  Bottom Layer w6: v2@2157.48,3061.42 2157.48,3033.67 2171.65,3019.5 2270.38,3019.5 2479,2810.88 2479,2107.35 v2(2463.78,2092.13)
  other v2: 2157.48,3062.2
SPI2_CS3: Molex1.5 P_IMU.10 | length 1753.7
  Top Layer w6: v2@2189.76,3061.42 2190.55,3060.63 2190.55,3060.45 Molex1.5@2219,3032 ; v2(2463.78,2057.48) 2474.78,2046.48 2756.52,2046.48 P_IMU.10@2929,1874
  Bottom Layer w6: v2@2189.76,3061.42 2220.68,3030.5 2274.94,3030.5 2490,2815.43 2490,2083.7 v2(2463.78,2057.48)
  other v2: 2189.76,3062.2
SPI2_MISO: Molex2.8 P_IMU.5 | length 1260.3
  Top Layer w6: Molex2.8@2122,2412 2122,2492.87 2210.07,2580.93 2533.93,2580.93 2670,2717 2923,2717 2968,2672 2968,2627 2989,2606 3074,2606 P_IMU.5
SPI2_MOSI: Molex2.9 P_IMU.4 | length 1165.3
  Top Layer w6: Molex2.9 2090.55,2517.55 2169,2596 2527,2596 2661,2730 2938,2730 P_IMU.4
SPI2_NSS: Molex2.15 P_IMU.11 | length 1297.1
  Top Layer w6: Molex2.15@1901.57,2392 1901.57,2356.69 1877,2332.12 1877,2184 1910,2151 2340,2151 2455.52,2035.48 2662.52,2035.48 P_IMU.11@2826.5,1871.5
SPI2_SCK: Molex2.14 P_IMU.6 | length 1566.7
  Top Layer w6: Molex2.14@1934,2419 1927,2426 1927,2472.76 2064.24,2610 2521,2610 2654,2743 2982,2743 2999,2760 3201,2760 3218,2743 P_IMU.6
SWCLK_I: Molex2.30 SWD.3 | length 1542.2
  Top Layer w6: SWD.3 1702.91,3235.9 v2(1815.19,3123.62) ; v2(2335,2248) 2335,2237 2342.52,2229.48 Molex2.30@2342.52,2219
  Bottom Layer w6: v2(1815.19,3123.62) 1843.31,3123.62 1980.43,2986.5 2256.71,2986.5 2387,2856.21 2387,2331.29 2332,2276.29 2332,2248 v2(2335,2248)
SWDIO_I: Molex2.29 SWD.1 | length 1517.7
  Top Layer w6: SWD.1 1749.13,3157.16 1806.3,3100 v2(1836.22,3100) ; v2(2303,2248) 2301,2248 2309,2240 Molex2.29@2309,2203.94
  Bottom Layer w6: v2(1836.22,3100) 1839.37,3100 1963.87,2975.5 2252.15,2975.5 2376,2851.65 2376,2335.84 2303,2262.84 v2(2303,2248)
TIM10_CH1: Molex1.24 P_IMU.3 | length 1200.6
  Top Layer w8: Molex1.24 2153.54,2791.54 2132,2770 2132,2646 2154,2624 2517,2624 2648,2755 2940,2755 v1(2951,2766) ; P_IMU.3@2925,2640 v1(2925,2668)
  Bottom Layer w8: v1(2925,2668) 2951,2694 v1(2951,2766)
USART1_RX_I: Molex2.28 UT1.4 | length 1485.5
  Top Layer w6: Molex2.28 2279.53,2263.53 2309.45,2293.45 v2(2309.45,2334.65)
  Bottom Layer w6: UT1.4 1736.7,3157.01 1940.2,2953.5 2243.04,2953.5 2354,2842.54 2354,2379.2 v2(2309.45,2334.65)
USART1_TX_I: Molex2.27 UT1.3 | length 1559
  Top Layer w6: Molex2.27 2248.03,2268.5 2279.53,2300 v2(2279.53,2311.02)
  Bottom Layer w6: UT1.3 1713.07,3196.38 1944.95,2964.5 2247.6,2964.5 2365,2847.09 2365,2352.4 2323.62,2311.02 v2(2279.53,2311.02)
USART2_RX_I: Molex2.1 UT2.4 | length 1175.9
  Top Layer w6: v2(2296.85,2477.95) 2342.52,2432.28 Molex2.1@2342.52,2415
  Bottom Layer w6: UT2.4 1895.39,2884.37 1942.52,2931.5 2233.93,2931.5 2332,2833.43 2332,2513.1 v2(2296.85,2477.95)
USART2_TX_I: Molex2.2 UT2.3 | length 1212.6
  Top Layer w6: v2(2287.4,2442.52) 2285.04,2440.16 2285.04,2444.75 2287.33,2442.45 2311.02,2418.76 Molex2.2
  Bottom Layer w6: UT2.3 1919.21,2923.74 1937.96,2942.5 2238.49,2942.5 2343,2837.98 2343,2488.67 2296.85,2442.52 v2(2287.4,2442.52)
USART3_RX_I: Molex2.13 UT3.4 | length 399
  Top Layer w6: v2(1947.24,2448.57) 1965,2430.82 Molex2.13@1965,2411
  Bottom Layer w6: UT3.4 1798.06,2610.94 1947.24,2461.76 v2(1947.24,2448.57)
USART3_TX_I: Molex2.12 UT3.3 | length 448.6
  Top Layer w6: v2(1978.74,2447) 1996.06,2429.68 Molex2.12
  Bottom Layer w6: UT3.3 1776.87,2650.31 v2@1979.46,2447.72
USART4_RX_I: Molex1.13 UT4.4 | length 1008.7
  Top Layer w6: Molex1.13@1964,2998 1964,2942 1938.58,2916.58 1938.58,2897.64 1959.06,2877.17 v2(1980.32,2877.17)
  Bottom Layer w6: UT4.4 1706.02,2336.73 1781.13,2411.83 1996.39,2411.83 2016,2431.44 2016,2815.5 1980.32,2851.18 v2(1980.32,2877.17)
USART4_TX_I: Molex1.12 UT4.3 | length 957.6
  Top Layer w6: v2(1958.27,2907.87) 1996,2945.61 Molex1.12@1996,2997
  Bottom Layer w6: UT4.3 1708.39,2376.1 1755.12,2422.83 1991.83,2422.83 2005,2436 2005,2810.94 1958.27,2857.67 v2(1958.27,2907.87)
USART5_RX_I: Molex2.3 P_LXIMU.5 UT5.4 | length 2032.2
  Top Layer w6: v2(2169.29,2131.5) 2229.79,2071 2299.67,2071 2539.67,1831 3051.6,1831 P_LXIMU.5@3116.99,1765.61 ; v2(2175,2284) 2200.25,2284 ; 2200.25,2284.25 2279.53,2363.53 Molex2.3
  VCC w6: v2(2169.29,2131.5) 2163,2137.79 2163,2272 v2(2175,2284)
  Bottom Layer w6: UT5.4 1702.91,2063.31 1833.33,2193.72 2062.23,2193.72 2152.5,2284 v2(2175,2284)
USART5_TX_I: Molex2.4 P_LXIMU.6 UT5.3 | length 1949.7
  Top Layer w6: v2(2131.5,2131.5) 2141.5,2131.5 2214.73,2058.27 2296.84,2058.27 2540.11,1815 2967.6,1815 P_LXIMU.6@3016.99,1765.61 ; v2(2169.49,2320.22) 2201.47,2320.22 ; 2201.47,2320.47 2248.03,2367.03 Molex2.4@2248.03,2386
  VCC w6: v2(2131.5,2131.5) 2150,2150 2150,2300.73 v2(2169.49,2320.22)
  Bottom Layer w6: UT5.3 1716.85,2102.68 1818.9,2204.72 2031.5,2204.72 2146.99,2320.22 v2(2169.49,2320.22)
USART_IMU_RX: P_LXIMU.8 UTIMU2.4 | length 2374
  Top Layer w6: UTIMU2.4 1702.91,3002.05 1707.78,3006.93 1707.78,3030.43 1745.05,3067.69 1843.28,3067.69 1876.38,3100.79 v2(1876.38,3121.84) ; v2(2460.63,1840.16) 2483.84,1840.16 2539,1785 2797.6,1785 P_LXIMU.8@2816.99,1765.61
  Bottom Layer w6: v2(1876.38,3121.84) 1923.04,3121.84 2036.39,3008.5 2265.82,3008.5 2466,2808.32 2466,2121 2445,2100 2445,1893.77 2460.63,1878.14 v2(2460.63,1840.16)
USART_IMU_TX: P_LXIMU.7 UTIMU2.3 | length 2467.5
  Top Layer w6: UTIMU2.3 1714.65,2962.68 1739.37,2987.4 1739.37,3046.46 1749.61,3056.69 1858.27,3056.69 v2(1897.64,3096.06) ; v2(2433.07,1866.14) 2473.41,1866.14 2537.56,1802 2867.78,1802 2904.18,1765.61 P_LXIMU.7@2916.99,1765.61
  Bottom Layer w6: v2(1897.64,3096.06) 1903.15,3096.06 2001.72,2997.5 2261.27,2997.5 2452,2806.76 2452,2125 2433.07,2106.07 v2(2433.07,1866.14)
VCC_3.3V: SWD.4
VCC_5.0V: D1.2 Molex1.28 Molex1.29 Molex1.30 P_IMU.2 P_LXIMU.2 R2.2 R4.2 RGB1.0 RGB1.1 RGB1.3 RGB1.5 RGB.1 SBUS.2 USB_CORE.A4 USB_CORE.A9 USB_CORE.B4 USB_CORE.B9 USB_IMU.A4 USB_IMU.A9 USB_IMU.B4 USB_IMU.B9 UT1.1 UT2.1 UT3.1 UT4.1 UT5.1 UTIMU2.1 | length 5724.5
  Top Layer w8: v1(2398.43,3192.13) 2407.81,3201.51 2566.08,3201.51 v2(2637.01,3272.44)
  Top Layer w15: v2(1613.39,2063.78) 1613.7,2063.47 RGB.1
  Top Layer w20: v2(1614.17,2883.46) 1614.65,2883.95 UTIMU2.1 UTIMU2.1@1687.16,2883.95
  Top Layer w45: P_IMU.2 2818,2641 2917,2542 P_LXIMU.2
  VCC w20: 1603.15,2063.78 v2(1613.39,2063.78) 1879.53,2063.78 1925.98,2017.32 2221.26,2017.32 2270.08,1968.5 v2(2270.08,1936.22) v1(2270.08,1874.8)
  VCC w30: v1@2281.89,2774.8 2281.89,3102.36 v1(2347.24,3167.72)
  VCC w45: 1603.15,2063.78 1603.15,2454.33 1603.15,2883.46 1603.15,3274.8 1603.15,3302.77 1629.51,3329.13 2210.24,3329.13 v1(2347.24,3192.13) ; v1(2397.64,3167.72) 2398.43,3167.72 2797.64,2768.5 ; 2810.24,2762.54 2810.24,2685.04 2929.13,2566.14 2960.63,2597.64
  Bottom Layer w8: v2(2637.01,3272.44) 2637.01,3274.8 2638.59,3276.39 R2.2 ; R4.2 2890.47,2470.53
  Bottom Layer w15: v2(1609.45,2181.89) 1609.92,2181.42 UT5.1 UT5.1@1687.16,2181.42 ; v2(1612.6,3274.8) 1612.91,3275.12 UT1.1 ; v2(1613.39,2728.35) 1614.09,2729.05 UT3.1 UT3.1@1687.16,2729.05 ; v2(1614.17,2454.33) 1614.68,2454.84 UT4.1 UT4.1@1687.16,2454.84 ; v2(1614.17,3003.15) 1614.84,3002.48 UT2.1 UT2.1@1687.16,3002.48 ; 3074.5,2642.5 3074.5,2739.85 3200.41,2865.76 SBUS.2
  Bottom Layer w20: 2932.5,2500.5 3074.5,2642.5 3082,2650
  other v1: 3064,2074 3085,2074 3065,2263 3086,2263 3068,2460 3089,2460 2900,2461 2931,2461 2900,2488 2931,2490 2309.79,2747.23 2284.59,2748.02 2284.59,2773.21 2309,2774 2372.44,3167.72 2374.02,3192.13
VCC_IN: D2.2 F1.1 R5.2 T.C1-1.1 T.C1.1 U1.7 | length 1277.6
  Bottom Layer w20: 2498.5,3389.5 2498.5,3388.56 R5.2
  Bottom Layer w40: U1.7 2126.06,3338.51 2166.93,3297.64 2166.93,3259.82 2176.46,3250.29 T.C1.1 2193.34,3250.68 2333.47,3250.68 T.C1-1.1 2335.36,3252.57 2402,3252.57
  Bottom Layer w60: 2402,3252.57 2465,3315.57 2465,3356 2498.5,3389.5 2556,3447 2896,3447 2989,3354 F1.1@3042,3354
VOL_BAT: F1.2 P13.1 P13.2 | length 425.1
  Bottom Layer w40: 3170.61,3059.39 3186,3044 3204.82,3044 3201.89,3046.93 3233.33,3046.93
  Bottom Layer w60: F1.2 3066.8,3281.2 3133,3215 3133,3097 3170.61,3059.39 P13.1
X_IO_1: Molex1.9
X_IO_2: Molex1.8
X_IO_3: Molex1.7
X_IO_4: Molex1.17
pads on no net: Molex1.16 U1.2 U1.3 U1.5 USB_CORE.0 USB_CORE.A8 USB_CORE.B8 USB_IMU.0 USB_IMU.A8 USB_IMU.B8

## Polygon pours and split planes (outlines as drawn)
GND on Top Layer "gnd" (solid, remove dead copper, pour order 8): 1474,3512 1474,1715 3455,1715 3455,3507 3457,3509
GND on Bottom Layer "gnd" (solid, remove dead copper, pour order 7): 1468.11,3509.04 1468.11,1712.04 3449.11,1712.04 3449.11,3504.04 3451.11,3506.04
GND on GND "gnd" (solid, remove dead copper, pour order 6): 1474,3512 1474,1715 3455,1715 3455,3507 3457,3509
GND on VCC "gnd" (solid, remove dead copper, pour order 5): 1484,3499 1484,1702 3465,1702 3465,3494 3467,3496

## Keep-outs
Keep-Out Layer:
  lines w8: 3401.35,1728.35 3428.35,1755.35 3428.35,1986
  lines w10: 3401.35,1728.35 2663.39,1728.35 1511.65,1728.35 1492.13,1747.87 1492.13,3474.13 1518,3500 2257.87,3500 3391,3500 ; 3428.35,1986 3428.35,3462.65 ; 3391,3500 3428.35,3462.65 ; 3391,3500 3428.35,3462.65

## Other copper
Top Layer:
  rectangle net VCC_5.0V: 2885,2447 2948,2522
  rectangle net VCC_5.0V: 2272.69,2735 2353,2838.15
  rectangle net VCC_5.0V: 2168,1818.07 2245.77,1985
  rectangle net VCC_5.0V: 2271.65,3154.33 2413.39,3205.51
  rectangle net NetD1_1: 2046.46,3272.44 2231.5,3409.45
  rectangle net NetC1_1: 1960.63,3164.57 2074.02,3255.91
VCC:
  rectangle net VCC_5.0V: 3020,2059 3052,2473
  rectangle net VCC_5.0V: 3027,2059 3104,2089
  rectangle net VCC_5.0V: 3029,2248 3106,2278
  rectangle net VCC_5.0V: 2884,2445 3108,2473
  rectangle net VCC_5.0V: 2267,2733 2326.06,2791.27
  rectangle net VCC_5.0V: 2331.5,3154.33 2413.39,3206.3
  rectangle net VCC_5.0V: 2781.1,2751.18 2842.52,2785.04
  rectangle net VCC_5.0V: 2885.83,2450 2948.03,2582.68
Bottom Layer:
  rectangle net VCC_5.0V: 3052,2063 3120,2085
  rectangle net VCC_5.0V: 3053,2252 3121,2274
  rectangle net VCC_5.0V: 3056,2449 3124,2471
  rectangle net VCC_5.0V: 3078,2639 3122,2661
  rectangle net VCC_5.0V: 2884,2446 2952,2512
  rectangle net GND: 1818.9,3167.72 1941.73,3260.63
  rectangle net NetC1_1: 1961.42,3165.35 2073.23,3256.69
  rectangle net NetC1_1: 2009.45,3165.35 2073.23,3303.15
  rectangle net VOL_BAT: 3162,3022.83 3262.99,3106

## Silkscreen, mask and mechanical layers (free items; w line width, h text height)
Top Overlay:
  rectangle: 2560.99,2047 3334,2504.61
  rectangle: 2689,1905 3331,2050
  text "CORE" at 1919.68,2558.27 h80
  text "TKZ IMU" at 2535,2229 h60 r90
  text "." at 1760.63,2051.97 h300
  text "LX IMU" at 2535,1787 h60 r90
Bottom Overlay:
  rectangle: 3056.69,1727.56 3093.7,2170.08
  region: 2843.31,2173.23 2782.68,2112.6 2782.68,1728.35 2842.52,1728.35 2844.09,1729.92
  region: 2827.56,2157.48 3093.7,2157.48 3093.7,2423.62
  region: 2480.32,2387.4 2480.32,2156.69 2477.95,2154.33 2114.96,2154.33
  region: 1896.85,3029.92 1896.85,2785.83 2410.24,3029.92 2139.37,3031.5
  lines w6: 2530,2808 2530,3211 ; 2531,2935 2775.16,2935 ; 2531,3037 2773.61,3037 ; 2531,3134 2770.22,3134 ; 2608,2812 2608,3251 ; 2694,2812 2694,3252 ; 2775.59,2806.3 2775.59,2830.71
  lines w10: 1681.1,2265.35 1894.49,2265.35 ; 1681.1,2491.34 1896.06,2491.34 ; 1681.1,2711.02 1892.91,2711.02 ; 1681.1,2938.58 1891.34,2938.58 ; 1712.6,1974.02 1894.49,2155.91 2479.53,2155.91 ; 1726.77,3501.57 1726.77,3200 1896.85,3029.92 ; 1896.85,2155.91 1896.85,3029.92 ; 2477.17,2805.51 2777.49,2805.51 2843.31,2739.69 2843.31,2173.23 ; 2775.59,3038.98 3092.91,3038.98 ; 2775.59,3139.37 3092.91,3139.37 ; 2777.95,2937.8 3093.7,2937.8 ; 2782.68,1728.35 2782.68,2112.6 ; 2885.04,2830.71 2885.04,3248.82 ; 2986.61,2832.28 2986.61,3248.03 ; 3094.49,3249.61 2567.61,3249.61 2479.53,3161.53 2479.53,3029.92 ; 3094.49,3354.33 3094.49,3250.39 ; 1896.85,3029.92 2479.53,3029.92 ; 2479.53,2155.91 2479.53,3029.92 ; 2479.53,2155.91 2522.83,2112.6 2782.68,2112.6 ; 2782.68,2112.6 2843.31,2173.23 ; 2843.31,2173.23 3094.49,2424.41 3094.49,2830.71 ; 3094.49,2830.71 3094.49,3250.39 ; 3094.49,2830.71 2775.59,2830.71 2775.59,3247.24 2778.74,3250.39 2788.98,3250.39 3094.49,3250.39
  text "POWER" at 3071,3409 h50
  text "+" at 2690.55,3333.86 h60
  text "G" at 2748.18,3155.88 h50
  text "1" at 2577.34,3154.88 h50
  text "5" at 2671,3154.88 h50
  text "VGTR VGTR VGTR VGTR VGTR" at 1777,3130 h45 r90
  text "2S--6S IN" at 2444.88,3077.17 h50
  text "G" at 2748.18,3056.41 h50
  text "2" at 2594,3055.41 h50
  text "6" at 2671,3055.41 h50
  text "U1  U2  U3  U4  U5" at 1875,3043 h50 r90
  text "VVGG" at 3117.32,3021.26 h50 r270
  text "G" at 2748.18,2956.93 h50
  text "3" at 2594,2955.93 h50
  text "7" at 2671,2955.93 h50
  text "G" at 2748.18,2857.46 h50
  text "4" at 2594,2856.46 h50
  text "8" at 2671,2856.46 h50
  text "GVS" at 3119.69,2788.19 h50 r270
  text "MAX 8CH" at 2889,2451 h50 r270
  text "PWM OUT" at 2996.06,2450.39 h50 r270
  text "USBIMU" at 3254,2416 h50 r270
  text "匿名科创" at 2316,2367 h160 r270
  text "SBUS" at 2757.48,2298.43 h50
  text "开源飞控" at 2133,2255 h160 r270
  text "REVERSE" at 2828.35,2218.11 h50
  text "开发平台" at 1954,2184 h160 r270
  text "USBMCU" at 3261,2030 h50 r270
  text "RGB" at 2589.76,2002.36 h50 r90
  text "AMP" at 2688.19,2002.36 h50 r90
  text "ANO TC" at 2831.5,1727.56 h120 r270
Bottom Solder:
  text "ANO TC" at 2904.72,1751.18 h120 r270

## Text inside footprints (layer, text, board x,y; h text height)
P_IMU: Top Overlay "LED" at 2573,2002 h80 r315
P_LXIMU: Top Overlay "LED" at 2569,1875 h80 r315
RGB1: Top Overlay "B" at 2185.93,1957.36 h30; Top Overlay "R" at 2185.93,1892.36 h30; Top Overlay "G" at 2185.93,1827.36 h30